# Altium PCB SPECTRE_3.0.PcbDoc
Units mm, origin at the board's own origin, x right, y up, seen from the top; angles counter-clockwise.
Board outline 28.3 x 73.29 mm, 4 copper layers (Top Layer, Signal Layer 1, Signal Layer 2, Bottom Layer), stack 0.778 mm thick; 70 components, 62 nets, 294 pads, 96 vias.
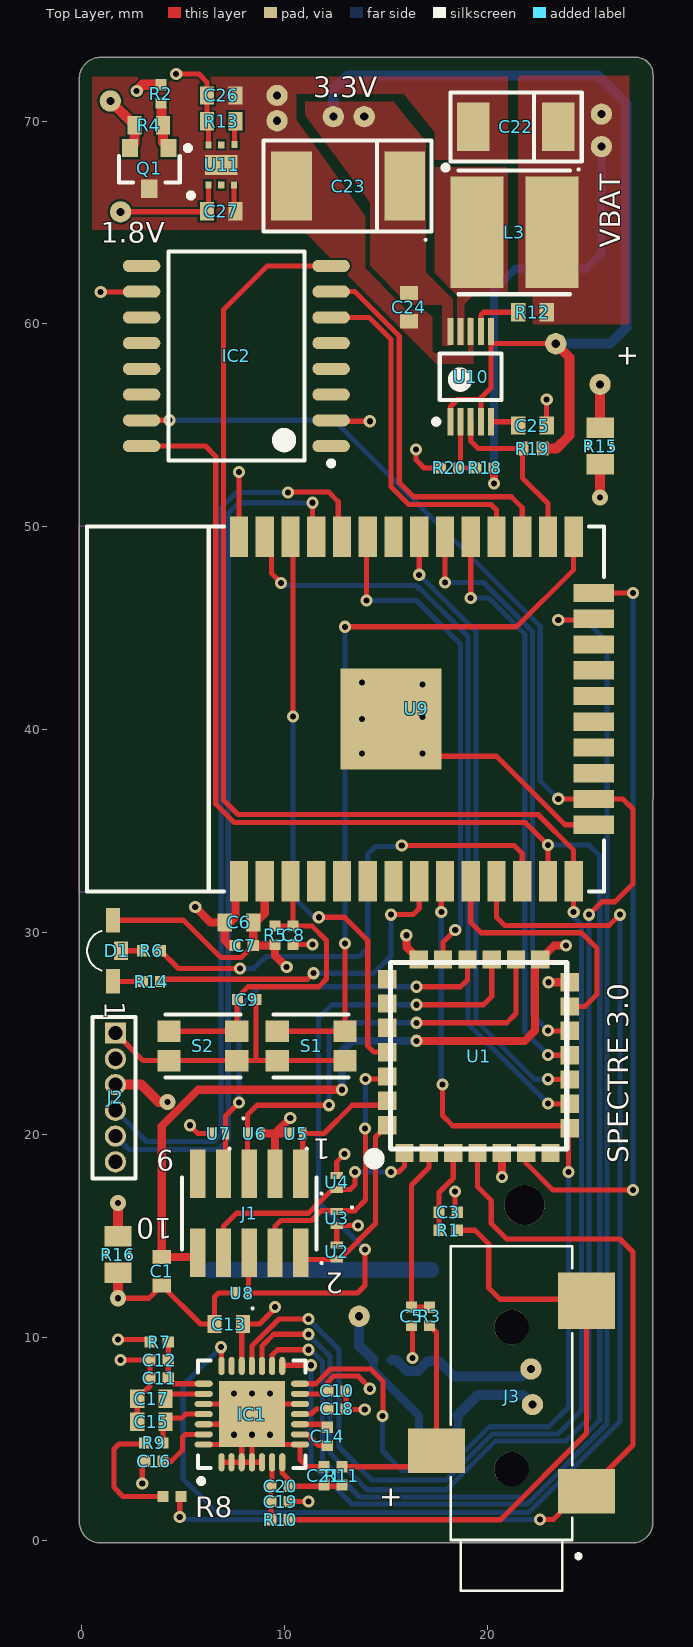
[diagram p0: Top Layer view]
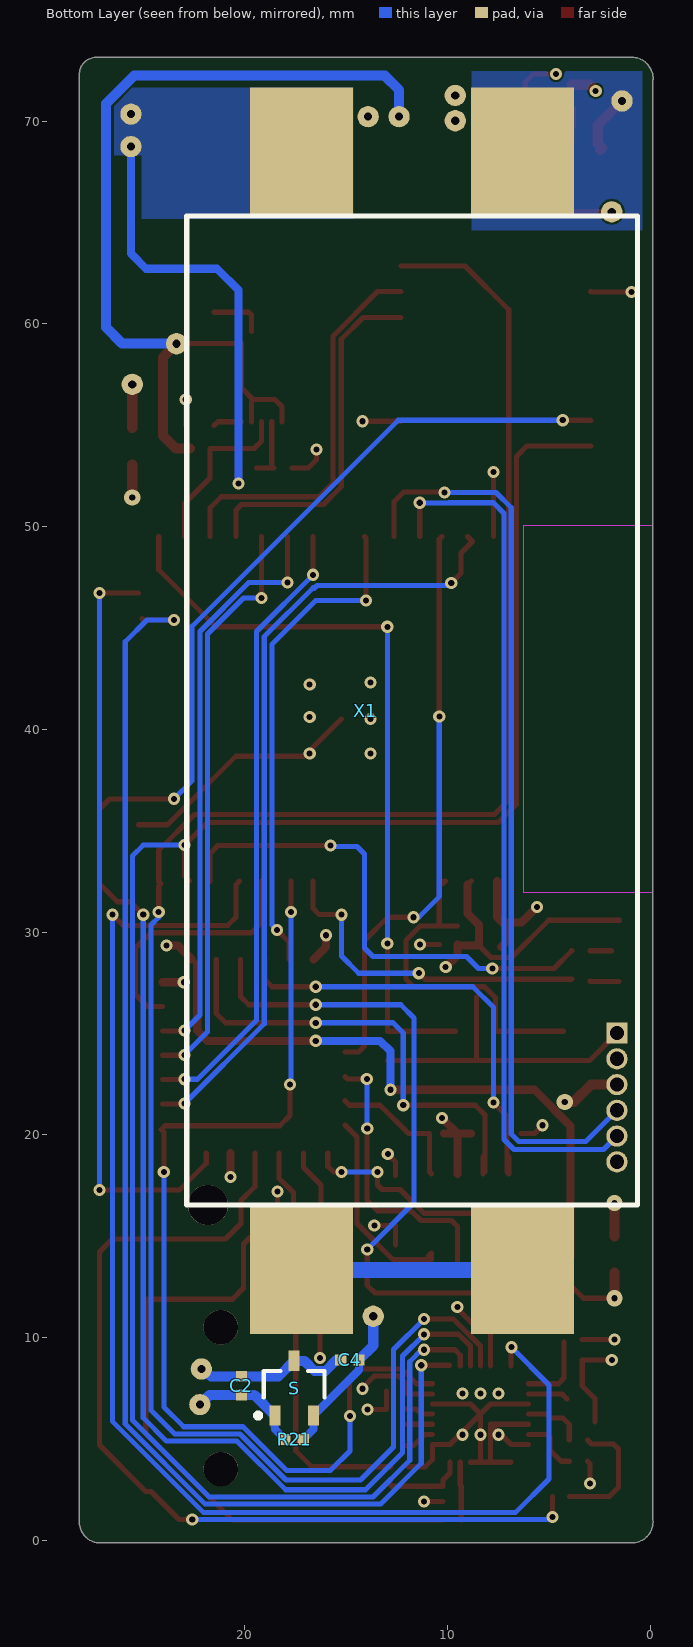
[diagram p1: Bottom Layer view, seen from below]
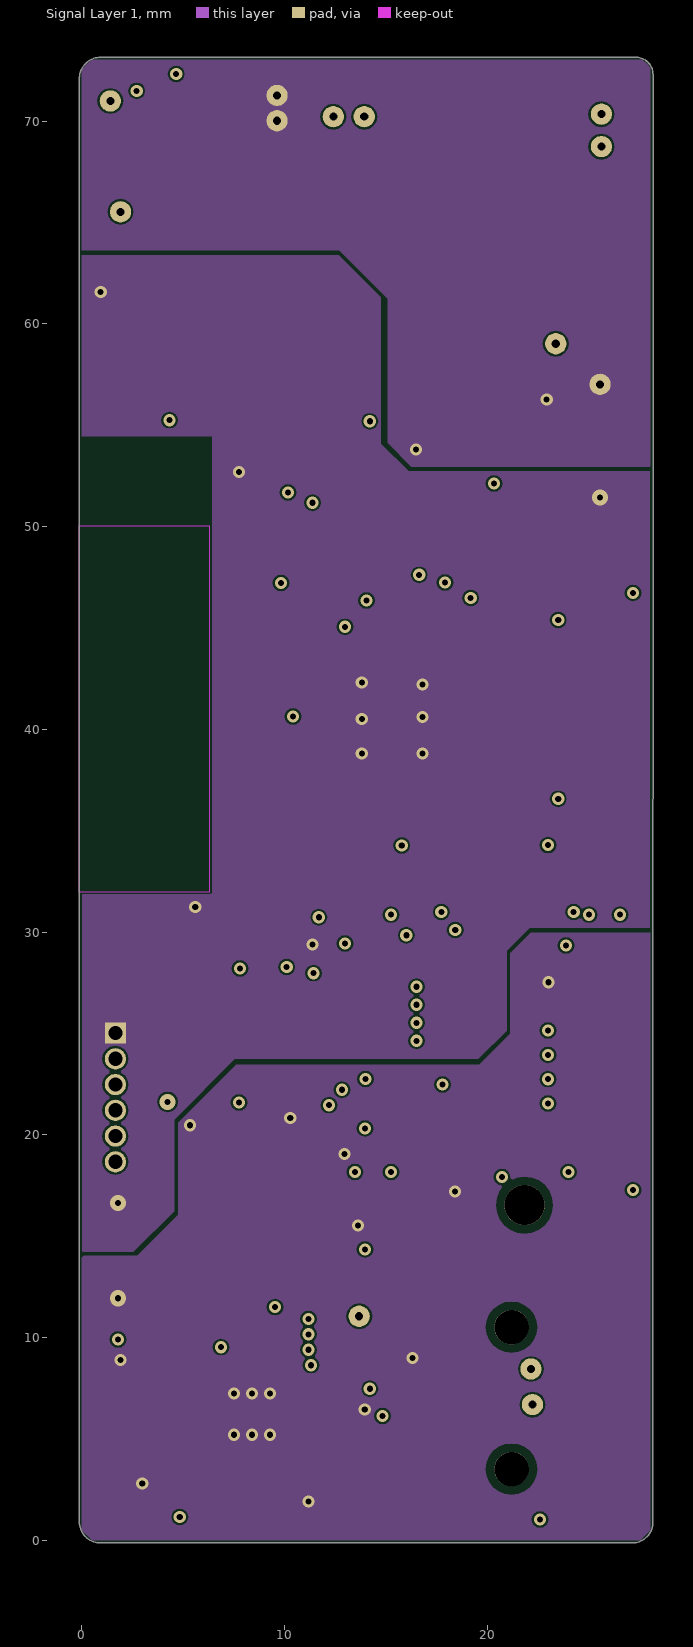
[diagram p2: Signal Layer 1]
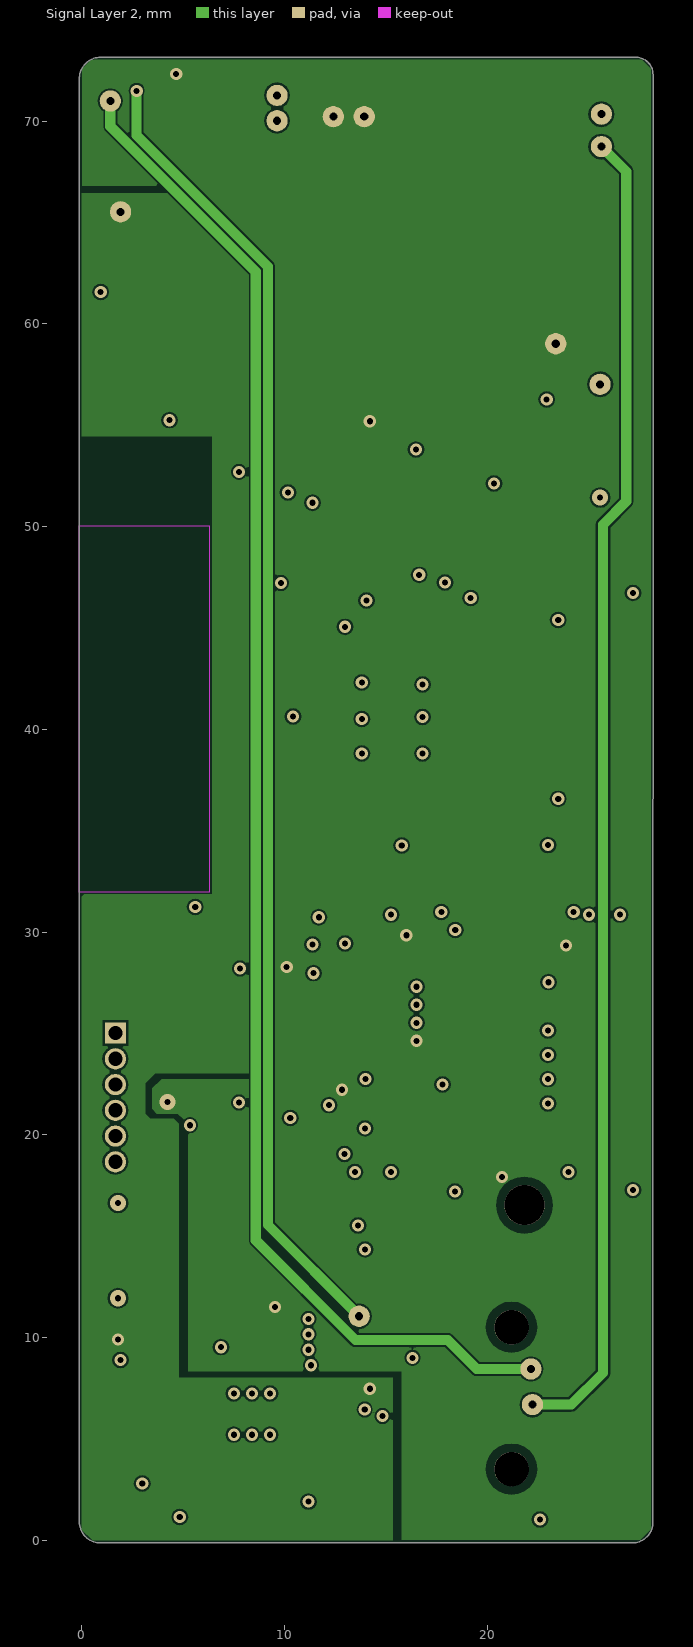
[diagram p3: Signal Layer 2]
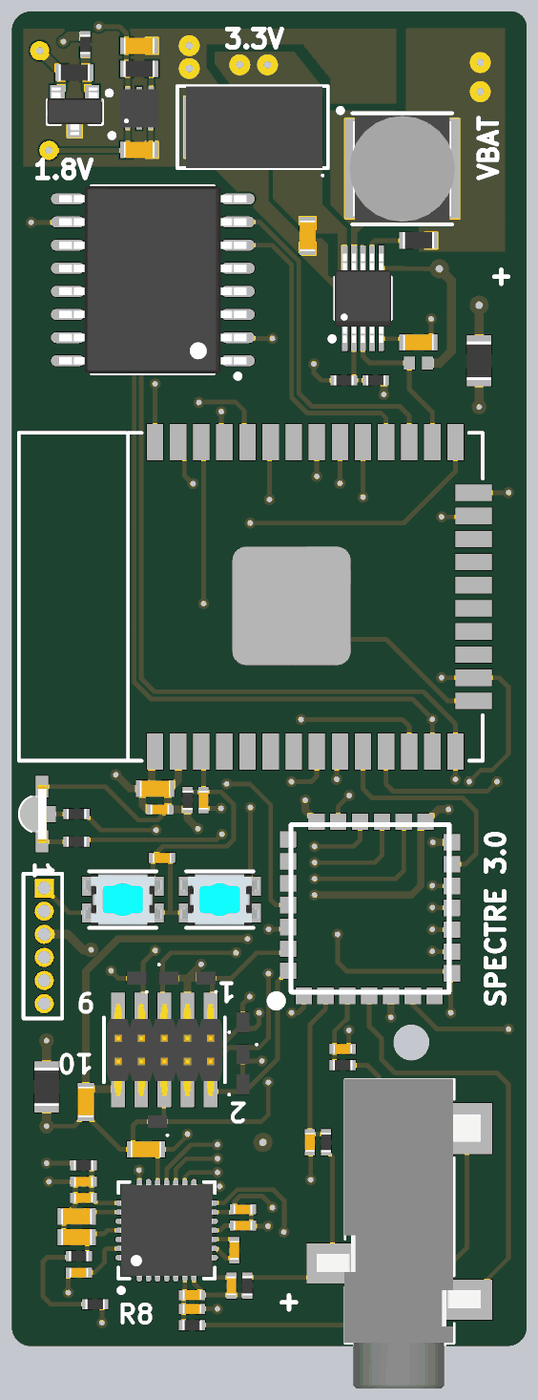
[diagram p4: 3D render of the assembled board from above, using the file's embedded part models]
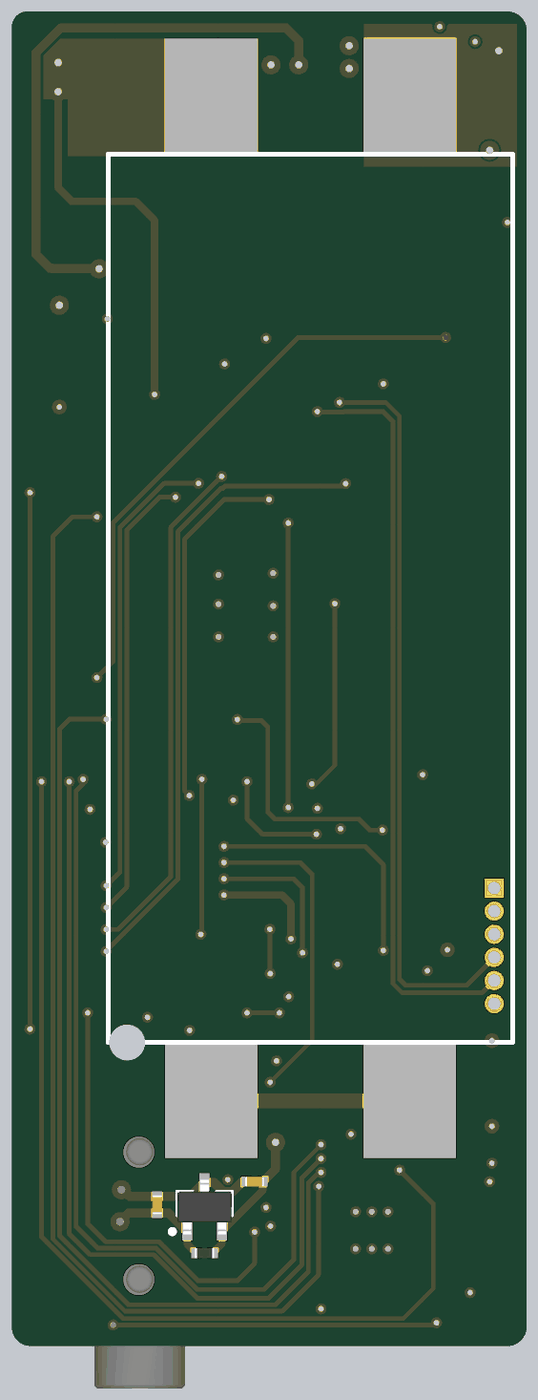
[diagram p5: 3D render of the assembled board from below, using the file's embedded part models]

## Layer stack, top to bottom
Top Solder: solder mask 0.0102, Solder Resist, Dk 3.5
Top Layer: signal copper 0.0356
Dielectric 1: core 0.254, FR-4, Dk 4.2
Signal Layer 1: signal copper 0.036
Dielectric 7: prepreg 0.127, Dk 4.2
Signal Layer 2: signal copper 0.036
Dielectric 5: core 0.254, Dk 4.2
Bottom Layer: signal copper 0.0356
Bottom Solder: solder mask 0.0102, Solder Resist, Dk 3.5

## Board outline
0.925,-0.133 cw(c0.925,0.923) -0.127,1.008 cw(c0,0.998) -0.127,1.01 cw(c0,1.025) -0.127,1.025 -0.127,72.049 cw(c-0.003,72.075) -0.13,72.071 cw(c0.925,72.1) 1.01,73.152 cw(c1,73.025) 1.014,73.152 cw(c1.027,73.025) 1.027,73.152 27.281,73.152 cw(c27.304,73.027) 27.3,73.154 cw(c27.323,72.305) 28.173,72.305 cw(c27.323,72.305) 28.17,72.241 28.169,0.897 cw(c28.042,0.897) 28.169,0.894 ccw(c27.142,0.897) 28.169,0.897 28.169,0.894 cw(c27.142,0.897) 27.064,-0.127 0.962,-0.127 cw(c0.925,-0.005)

## Design rules (kind name [scope] priority, off if disabled: settings)
Clearance Clearance_Via_Via_Same_Net [isVia vs isVia] p1: gap=0.15 ignorepadtopadclearanceinfootprint=FALSE except(0: Arc-Hole Track-Hole SMDPad-Hole THPad-Hole Via-Hole Fill-Hole Poly-Hole Region-Hole Text-Hole)
Clearance Clearance_KeepOut [All vs OnLayer('Keep-Out Layer')] p2 off: gap=1 ignorepadtopadclearanceinfootprint=FALSE except(0: Arc-Hole Track-Hole SMDPad-Hole THPad-Hole Via-Hole Fill-Hole Poly-Hole Region-Hole Text-Hole)
Clearance Clearance_NDK [NOT PadIsPlated] p3: gap=0.4 ignorepadtopadclearanceinfootprint=FALSE except(0: Arc-Hole Track-Hole SMDPad-Hole THPad-Hole Via-Hole Fill-Hole Poly-Hole Region-Hole Text-Hole)
Clearance [All] p4: gap=0.1 ignorepadtopadclearanceinfootprint=FALSE except(0: Arc-Hole Track-Hole SMDPad-Hole THPad-Hole Via-Hole Fill-Hole Poly-Hole Region-Hole Text-Hole)
ComponentClearance [All] p1: gap=0 collisioncheckmode=3 verticalgap=0.254 showdistances=FALSE
FabricationTestPointUsage TestPointUsage [All] p1: valid=0 allowmultiple=FALSE
FabricationTestpoint Testpoint [All] p1: side=3 testpointundercomponent=TRUE minsize=1.016 maxsize=2.54 preferedsize=1.524 minholesize=0 maxholesize=1.016 preferedholesize=0.813 testpointgrid=0.025 allowsidetop=TRUE allowsidebottom=TRUE usegrid=TRUE gridtolerance=0
HoleSize [All] p1: absolutevalues=TRUE maxlimit=6 minlimit=0.3 maxpercent=80.000 minpercent=20.000
MinimumAnnularRing MinimumAnnularRing_Vias [isVia] p1: minimumring=0.1
MinimumAnnularRing [All] p2: minimumring=0.1
MinimumSolderMaskSliver [All] p1: minsoldermaskwidth=0.1
NetAntennae [All] p1 off: netantennaetolerance=0
PlaneConnect PlaneConnect_Vias [isVia] p1: planeconnectstyle=Direct reliefexpansion=0.508 reliefentries=4 reliefconductorwidth=0.254 reliefairgap=0.254
PlaneConnect [All] p2: planeconnectstyle=Direct reliefexpansion=0.508 reliefentries=4 reliefconductorwidth=0.254 reliefairgap=0.254
PolygonConnect PolygonConnect_Vias [isVia] p1: connectstyle=Direct reliefconductorwidth=0.254 reliefentries=4 polygonreliefangle="90 Angle" airgapwidth=0.254
PolygonConnect [All] p2: connectstyle=Direct reliefconductorwidth=0.254 reliefentries=4 polygonreliefangle="90 Angle" airgapwidth=0.254
RoutingVias [All] p1: holewidth=0.5 width=0.8 viastyle="Through Hole" minholewidth=0.3 minwidth=0.5 maxholewidth=0.8 maxwidth=1
SMDEntry [All] p1: side=TRUE corner=TRUE anyangle=TRUE
SMDToCorner [All] p1 off: distance=196850
SilkToSilkClearance [All] p1 off: silktosilkclearance=0.15
SilkToSolderMaskClearance SilkscreenOverComponentPads [IsPad] p1 off: minsilkscreentomaskgap=0.15 clearancetoexposedcopper=FALSE
SolderMaskExpansion [All] p1: expansion=0.05 istentingtop=FALSE
ViasUnderSMD [All] p1: allowed=FALSE
Width [All] p1: maxlimit=10 minlimit=0.15 preferedwidth=0.254 checkconnectedcopper=TRUE
21 further rules are at their usual default settings.

## Classes and differential pairs
component class U_VCC: C2 C4 C22 C23 C24 C25 C26 C27 L3 Q1 R2 R4 R12 R13 R15 R16 R18 R19 R20 R21 S U10 U11 X1
component class U_SPI-Flash: IC2
component class U_MAX30003: C10 C11 C12 C13 C14 C15 C16 C17 C18 C19 C20 C21 IC1 R7 R8 R9 R10 R11
component class U_ESP32: C6 C7 C8 C9 D1 J2 R5 R6 R14 S1 S2 U9
component class U_Electrodes_SFH: C3 C5 J3 R1 R3
component class U_AFE4900: C1 J1 U1 U2 U3 U4 U5 U6 U7 U8

## Components (designator, comment, footprint, x,y, rotation, side; value= is the part's Value field where it differs from the comment)
C1 "22u" CAPC1608X05N 3.937,13.273 r90 top
C2 "10n" CAPC1005X03N 20.175,7.625 r270 bottom
C3 "10n" CAPC1005X03N 18.061,16.181 r180 top
C4 "100p" CAPC1005X03N 14.825,8.9 r0 bottom
C5 "10n" CAPC1005X03N 16.256,11.049 r90 top
C6 "10u" CAPC1608X05N 7.747,30.48 r180 top
C7 "100n" CAPC1005X03N 8.001,29.337 r180 top
C8 "100n" CAPC1005X03N 10.414,29.845 r90 top
C9 "100n" CAPC1005X03N 8.128,26.67 r0 top
C10 "1u" CAPC1005X03N 12.573,7.366 r180 top
C11 "1u" CAPC1005X03N 3.81,8.001 r0 top
C12 "100n" CAPC1005X03N 3.81,8.89 r0 top
C13 "10u" CAPC1608X05N 7.239,10.668 r180 top
C14 "1u" CAPC1005X03N 12.1,5.125 r270 top
C15 "10u" CAPC1608X05N 3.429,5.842 r0 top
C16 "1u" CAPC1005X03N 3.55,3.9 r0 top
C17 "10u" CAPC1608X05N 3.429,6.985 r0 top
C18 "1n" CAPC1005X03N 12.573,6.477 r180 top
C19 "10p" CAPC1005X03N 9.779,1.905 r180 top
C20 "1n" CAPC1005X03N 9.779,2.667 r180 top
C21 "10p" CAPC1005X03N 11.938,3.175 r90 top
C22 "47u" "AVX TPSC476M016R0350" -46.796,32.323 r180 top
C23 "47u" "AVX TPSD107M010R0100 100uF" 13.208,66.802 r180 top
C24 "1u" CAPC1608X05N 16.129,60.833 r90 top
C25 "100n" CAPC1608X05N 22.225,54.991 r0 top
C26 "1u" CAPC1608X05N 6.873,71.272 r180 top
C27 "1u" CAPC1608X05N 6.873,65.557 r180 top
D1 "Red & Bright Green, 120deg" WL-SBSW_1204 1.016,29.083 r90 top
IC1 "MAX30003" MAX30003CTI+T2855-8 8.382,6.223 r90 top
IC2 "SPI Flash Memory Chip 1Gbit S70FL01GS" S70FL01GS 7.62,58.42 r180 top
J1 "1.27 mm_SMD_Vertical_10 pin" 62131021021 8.255,16.129 r180 top
J2 "SLM-106-01-G-S" SLM-106-01-G-S 2.286,22.479 r270 top
J3 "SJ-3523-SMT-TR" *CUI_SJ-3523-SMT-TR 21.192,3.513 r90 top
L3 "22uH" CD54-220 21.336,64.516 r0 top
Q1 "NTR4170NT1G MOSFET" NTR4170NT1G 3.325,67.675 r270 top
R1 "499k" RESC1005X03N 18.061,15.292 r180 top
R2 "100R" RESC1005X03N 3.9,71.35 r270 top
R3 "499k" RESC1005X03N 17.145,11.049 r90 top
R4 "10M" RESC1608X05N 3.3,69.8 r180 top
R5 "10k" RESC1005X03N 9.525,29.845 r270 top
R6 "340" RESC1005X03N 3.429,29.083 r180 top
R7 "0R" RESC1005X03N 3.81,9.779 r0 top
R8 "0R" RESC1005X03N 4.445,2.159 r180 top
R9 "499k" RESC1005X03N 3.55,4.8 r0 top
R10 "50k" RESC1005X03N 9.779,1.016 r180 top
R11 "50k" RESC1005X03N 12.827,3.175 r270 top
R12 "200R" RESC1608X05N 22.225,60.579 r180 top
R13 "0R" RESC1608X05N 6.873,70.002 r0 top
R14 "1k" RESC1005X03N 3.429,27.559 r180 top
R15 "0R" RESC2012X05N 25.56,53.975 r270 top
R16 "0R" RESC2012X05N 1.778,14.097 r270 top
R18 "0R" RESC1005X03N 19.875,52.9 r0 top
R19 "R 0402" "R 0402" 22.225,53.85 r0 top
R20 "0R" RESC1005X03N 18.125,52.9 r0 top
R21 "100k" RESC1005X03N 17.575,4.975 r0 bottom
S "MLX90248 Hall Switch" MLX90248 17.575,7.5 r90 bottom
S1 "434153017835" 434153017835 11.303,24.384 r0 top
S2 "434153017835" 434153017835 5.969,24.384 r0 top
U1 "AFE4900_special" AFE4900_Breakout 19.558,23.622 r180 top
U2 "TPD1E10B06DPYR" TPD1E10B06DPYR_0402 12.573,14.224 r90 top
U3 "TPD1E10B06DPYR" TPD1E10B06DPYR_0402 12.573,15.875 r270 top
U4 "TPD1E10B06DPYR" TPD1E10B06DPYR_0402 12.573,17.653 r90 top
U5 "TPD1E10B06DPYR" TPD1E10B06DPYR_0402 10.541,20.066 r180 top
U6 "TPD1E10B06DPYR" TPD1E10B06DPYR_0402 8.509,20.066 r0 top
U7 "TPD1E10B06DPYR" TPD1E10B06DPYR_0402 6.731,20.066 r180 top
U8 "TPD1E10B06DPYR" TPD1E10B06DPYR_0402 7.874,12.192 r180 top
U9 "ESP32" ESP32-WROOM-32 13.007,41.012 r90 top
U10 "MAX1676" MAX1676-Boost 19.177,57.404 r90 top
U11 "LDO 1.8V" TLV75518PDRVR 6.873,67.843 r90 top
X1 "SMT Battery Holder 2 Cells" "SMT Battery Holder" 11.755,40.93 r90 bottom

## Footprints (in the part's own frame and the unit in brackets; to place one, negate y for a bottom-side part, rotate by r counter-clockwise, add the part's x,y. Pads: shape width x height; smd on the part's side, far side on the other; paste and mask are expansions set on the pad)
62131021021 [mm] "Pin Header, pitch 1.27 mm, SMD, Vertical, dual row, 10p"
  rect 0.75x2.4 smd: 1(-2.54,-1.95) 2(-2.54,1.95) 3(-1.27,-1.95) 4(-1.27,1.95) 5(0,-1.95) 6(0,1.95) 7(1.27,-1.95) 8(1.27,1.95) 9(2.54,-1.95) 10(2.54,1.95)
  silkscreen extent -3.32,-1.78 3.32,1.78, body extent -3.18,-2.55 3.17,2.55, height 5.9
434153017835 [mm] "Tact Switch, SMD, body 3.5x2.9mm"
  rect 1.15x1.05 smd: 1(-1.675,0.725) 2(-1.675,-0.725) 3(1.675,0.725) 4(1.675,-0.725)
  silkscreen extent -1.85,-1.55 1.85,1.55, body extent -2.15,-1.45 2.15,1.45, height 1.7
*CUI_SJ-3523-SMT-TR [mm]
  rect 2.2x2.8 smd: 1(-1.1,-3.7) 3(0.9,3.7)
  rect 2.8x2.8 smd: 2(8.3,-3.7)
  round 1.7 hole 1.7 unplated: None(0,0) None(7,0)
  silkscreen extent -6,-3.4 11,3, body extent -5.98,-4.45 11.02,4.55, height 5
AFE4900_Breakout [mm]
  rect 0.9x0.9 smd: A1(2.444,4.518) A2(4.494,3.143) A3(4.494,0.743) A4(4.494,-0.457) A5(4.494,-1.657) B1(1.244,4.518) B2(3.644,4.518) B3(4.494,1.943) B5(4.494,-2.857) C1(-1.156,4.518) C2(0.044,4.518) C4(2.944,-5.032) C5(4.494,-4.057) D2(-3.556,4.518) D3(1.744,-5.032) D4(-0.656,-5.032) D5(-4.506,-3.907) E1(-2.356,4.518) E2(-4.506,0.893) E3(-4.506,-0.307) E4(-1.856,-5.032) E5(0.544,-5.032) F1(-4.506,3.293) F2(-4.506,2.093) F3(-4.506,-1.507) F4(-4.506,-2.707) F5(-3.056,-5.032)
  silkscreen extent -4.36,-4.88 5.28,4.93
"AVX TPSC476M016R0350" [mm] "47uF, 16V tantalum capacitor, DFN, 2-Leads, Body 3,25x6,00mm, Pitch 4,20mm, IPC Medium Density"
  rect 1.6x2.4 smd: 1(-70.3,-37.4) 2(-66.1,-37.4)
  silkscreen extent -71.45,-39.1 -64.97,-35.25, body extent -71.3,-39.1 -65.1,-35.7, height 2.8
"AVX TPSD107M010R0100 100uF" [mm] "100uF, 10V tantalum capacitor, DFN, 2-Leads, Body 4,35x7,30mm, Pitch 5,70mm, IPC Medium Density"
  rect 2x3.4 smd: 1(-2.718,0) 2(2.87,0)
  silkscreen extent -4.04,-2.25 4.24,2.7, body extent -3.75,-2.25 3.75,2.25, height 3.1
CAPC1005X03N [mm] "Chip Capacitor, 2-Leads, Body 1,00x0,50mm, IPC Medium Density, 0402"
  rect 0.55x0.55 smd: 1(-0.45,0) 2(0.45,0)
  body extent -0.52,-0.28 0.52,0.28, height 0.35
CAPC1608X05N [mm] "Chip Capacitor, 2-Leads, Body 1,60x0,80mm, IPC Medium Density, 0603"
  rect 0.7x0.9 smd: 1(-0.7,0) 2(0.7,0)
  body extent -0.85,-0.45 0.85,0.45, height 0.45
CD54-220 [mm] "22uF, 1.11A Inductor, Precision Wire Wound Inductor, 2-Leads, Body 5,20x5,80mm, IPC Medium Density"
  rect 2.6x5.5 smd: 1(-1.85,0) 2(1.85,0)
  silkscreen extent -3.52,-3.05 2.75,3.32, body extent -2.9,-2.9 2.9,2.9, height 4.95
ESP32-WROOM-32 [mm] "ESP32-WROOM-32-Module"
  rect 2x0.9 smd: 1(-8.5,5.26) 2(-8.5,3.99) 3(-8.5,2.72) 4(-8.5,1.45) 5(-8.5,0.18) 6(-8.5,-1.09) 7(-8.5,-2.36) 8(-8.5,-3.63) 9(-8.5,-4.9) 10(-8.5,-6.17) 11(-8.5,-7.44) 12(-8.5,-8.71) 13(-8.5,-9.98) 14(-8.5,-11.25) 25(8.5,-11.25) 26(8.5,-9.98) 27(8.5,-8.71) 28(8.5,-7.44) 29(8.5,-6.17) 30(8.5,-4.9) 31(8.5,-3.63) 32(8.5,-2.36) 33(8.5,-1.09) 34(8.5,0.18) 35(8.5,1.45) 36(8.5,2.72) 37(8.5,3.99) 38(8.5,5.26)
  rect 0.9x2 smd: 15(-5.715,-12.25) 16(-4.445,-12.25) 17(-3.175,-12.25) 18(-1.905,-12.25) 19(-0.635,-12.25) 20(0.635,-12.25) 21(1.905,-12.25) 22(3.175,-12.25) 23(4.445,-12.25) 24(5.715,-12.25)
  rect 5x5 smd paste+0.75: 101(-0.5,-2.24)
  silkscreen extent -9,-12.75 9,12.75, body extent -9,-12.75 9,12.75, height 2.3
MAX1676-Boost [mm] "Boost, Step-Up DC-DC Converter, TSSOP, 10-Leads, Body 2,82x1049,03mm, Pitch 0,50mm, IPC Medium Density"
  rect 1.35x0.3 smd: 1(-2.225,1) 2(-2.225,0.5) 3(-2.225,0) 4(-2.225,-0.5) 5(-2.225,-1) 6(2.225,-1) 7(2.225,-0.5) 8(2.225,0) 9(2.225,0.5) 10(2.225,1)
  silkscreen extent -2.35,-1.52 1.15,1.82, body extent -2.45,-1.55 2.45,1.55, height 1.1
MAX30003CTI+T2855-8 [mm] "QFN, 28-Leads, Body 5.00x5.00mm, Pitch 0.50mm, Thermal Pad 3.25x3.25mm, IPC Medium Density"
  oval 0.9x0.3 smd: 1(-2.375,1.5) 2(-2.375,1) 3(-2.375,0.5) 4(-2.375,0) 5(-2.375,-0.5) 6(-2.375,-1) 7(-2.375,-1.5) 15(2.375,-1.5) 16(2.375,-1) 17(2.375,-0.5) 18(2.375,0) 19(2.375,0.5) 20(2.375,1) 21(2.375,1.5)
  oval 0.3x0.9 smd: 8(-1.5,-2.375) 9(-1,-2.375) 10(-0.5,-2.375) 11(0,-2.375) 12(0.5,-2.375) 13(1,-2.375) 14(1.5,-2.375) 22(1.5,2.375) 23(1,2.375) 24(0.5,2.375) 25(0,2.375) 26(-0.5,2.375) 27(-1,2.375) 28(-1.5,2.375)
  rect 3.25x3.25 smd: 29(0,0)
  silkscreen extent -3.42,-2.65 2.65,2.65, body extent -2.52,-2.52 2.52,2.52, height 0.8
MLX90248 [mm] "Hall Switch 3V TSOT-3L Melexis"
  rect 1x0.55 smd: 1(-1.35,0.95) 2(-1.35,-0.95) 3(1.35,0)
  silkscreen extent -1.47,-1.5 0.85,1.9, body extent -1.5,-1.5 1.5,1.5, height 1
NTR4170NT1G [mm] "MOSFET 30V 3.9A - SOT23, 3-Leads, Body 2,92x2,45mm, Pitch 0,95mm, IPC Medium Density"
  rect 0.9x0.8 smd: 1(-1,0.95) 2(-1,-0.95) 3(1,0)
  silkscreen extent -1.12,-1.5 0.7,2.03, body extent -1.3,-1.52 1.3,1.52, height 1.11
"R 0402" [mm]
  rect 0.6x0.7 smd: 1(-0.5,0) 2(0.5,0)
  body extent -0.57,-0.28 0.57,0.28, height 0.48
RESC1005X03N [mm] "Chip Resistor, 2-Leads, Body 1,00x0,50mm, IPC Medium Density, 0402"
  rect 0.55x0.55 smd: 1(-0.45,0) 2(0.45,0)
  body extent -0.53,-0.28 0.53,0.28, height 0.35
RESC1608X05N [mm] "Chip Resistor, 2-Leads, Body 1,60x0,80mm, IPC Medium Density, 0603"
  rect 0.7x0.9 smd: 1(-0.7,0) 2(0.7,0)
  body extent -0.85,-0.45 0.85,0.45, height 0.45
RESC2012X05N [mm] "Chip Resistor, 2-Leads, Body 2,00x1,25mm, IPC Medium Density, 0805"
  rect 1x1.35 smd: 1(-0.9,0) 2(0.9,0)
  silkscreen extent -0.1,-0.58 0.1,0.58, body extent -1.05,-0.67 1.05,0.67, height 0.5
S70FL01GS [mm] "SOIC, 16-Leads, Body 10,30x7,50mm, Pitch 1,27mm, IPC Medium Density"
  oval 1.85x0.6 smd: 1(-4.675,4.445) 2(-4.675,3.175) 3(-4.675,1.905) 4(-4.675,0.635) 5(-4.675,-0.635) 6(-4.675,-1.905) 7(-4.675,-3.175) 8(-4.675,-4.445) 9(4.675,-4.445) 10(4.675,-3.175) 11(4.675,-1.905) 12(4.675,-0.635) 13(4.675,0.635) 14(4.675,1.905) 15(4.675,3.175) 16(4.675,4.445)
  silkscreen extent -4.8,-5.15 3.35,5.42, body extent -5.15,-5.15 5.15,5.15, height 2.65
SLM-106-01-G-S [mm] "Pin Header, pitch 1.27 mm, THT, Vertical, single row, 6p"
  rect 1.05x1.05 hole 0.7: 1(-2.54,-0.635)
  round 1.05 hole 0.7: 2(-1.27,-0.635) 3(0,-0.635) 4(1.27,-0.635) 5(2.54,-0.635) 6(3.81,-0.635)
  silkscreen extent -3.32,-1.78 4.62,0.36
"SMT Battery Holder" [mm] "SMT Battery Holder, Zylindrisch, 2 Cells AAA"
  round 1.98 hole 1.98 unplated mask+0.05: 0(-24.395,10.075)
  rect 6.35x5.08 smd: 1(-27.57,5.455) 2(-27.57,-5.455) 3(27.57,-5.455) 4(27.57,5.455)
  silkscreen extent -24.4,-11.11 24.4,11.11
TLV75518PDRVR [mm] "LDO1.8V, QFN, 6-Leads, Body 2.00x2.00mm, Pitch 0.00mm/0.65mm, Thermal Pad 1.00x1.60mm, IPC Medium Density"
  rect 0.35x0.3 smd: 1(-0.991,0.635) 2(-0.991,0) 3(-0.991,-0.635) 4(1.016,-0.66) 5(0.991,0) 6(0.991,0.635)
  rect 1x1.6 smd: 7(0,0)
  silkscreen extent -1.62,1.37 -1.38,1.62, body extent -1.05,-1.05 1.05,1.05, height 0.8
TPD1E10B06DPYR_0402 [mm] "ESD-Entstörer/TVS-Dioden, DFN, 2-Leads, 0402, Body 0.60x1.00mm, Pitch 0.70mm, IPC Medium Density"
  rect 0.35x0.6 smd: 1(-0.35,0) 2(0.35,0)
  silkscreen extent -0.6,0.7 -0.5,0.8, body extent -0.55,-0.35 0.55,0.35, height 0.45
WL-SBSW_1204 [mm] "SMD Bi-color Side view Waterclear, body 3.2x1mm"
  rect 0.9x0.7 smd: 1(0,-0.91)
  rect 1.2x0.7 smd: 2(1.5,-0.51) 3(-1.5,-0.51)
  silkscreen extent -0.98,0.04 0.98,0.75, body extent -1.6,-0.76 1.6,0.74, height 1.02

## Part data
C1: library part C_22u_0603, "Kondensator 22u 0603", Tested=False
C2 C3 C5: library part C_10n_50V_0402, "Kondensator 10n 50V 0402", Supplier Part Number 1=1828887, Supplier 1=Farnell, Tested=False
C4: library part C_100p_50V_0402, "Kondensator 100p 50V 0402", Supplier 1=Farnell, Tested=False
C6 C13 C15 C17: library part C_10u_10V_0603, "Kondensator 10u 10V 0603", Supplier Part Number 1=2521952, Supplier 1=Farnell
C7 C8 C9 C12: library part C_100n_50V_0402, "Kondensator 100n 50V 0402", Supplier Part Number 1=2210822, Supplier 1=Farnell, Tested=False
C10 C11 C14 C16: library part C_1u_6V3_0402, "Kondensator 1u 6V3 0402", Supplier Part Number 1=2672114, Supplier 1=Farnell, Tested=False
C18 C20: library part C_1n_50V_0402, "Kondensator 1n 50V 0402", Supplier Part Number 1=399-10034-1-ND, Supplier 1=Digikey, Tested=False
C19 C21: library part C_10p_25V_NP0_0402, "Kondensator 10p 25V NP0 0402", Supplier Part Number 1=710-885012005040, Supplier 1=Mouser, Tested=False
C22: library part C_47u_16V_2312, "Kondensator 47u 16V Tanatalum Capacitor", Cart=https://www.mouser.de/ProductDetail/AVX/TPSC476M016R0350?qs=%2Fha2pyFaduhj%252BASDCSGgk2azjUMSnKvo3TkO6PkyHka4p8K%2FssSCRw%3D%3D, Datasheet=https://www.mouser.de/datasheet/2/40/tps-776850.pdf
C23: library part C_100u_10V_2917, "Kondensator 100u 10V Tanatalum Capacitor", Cart=https://www.mouser.de/ProductDetail/AVX/TPSC476M016R0350?qs=%2Fha2pyFaduhj%252BASDCSGgk2azjUMSnKvo3TkO6PkyHka4p8K%2FssSCRw%3D%3D, Datasheet=https://www.mouser.de/datasheet/2/40/tps-776850.pdf
C24 C26 C27: library part C_1u_25V_0603, "Kondensator 1u 25V X7R 0603", Supplier Part Number 1=2495176, Supplier 1=Farnell, Tested=False
C25: library part C_100n_50V_0603, "Kondensator 100n 50V 0603", Supplier Part Number 1=1759122, Supplier 1=Farnell
D1: library part 155124RV73200, "WL-SBSW SMT Bi-color Side View Waterclear, size 1204, Red & Bright Green, 120deg", Emitting Color="Red & Bright Green", Forward Voltage="2V@Red, 2.1V@Bright Green", Operating Temperature="-40 to +85degC", Chip Technology=AlInGaP, ComponentLink1Description=Manufacturer, ComponentLink1URL=http://www.we-online.de, ComponentLink2Description=Datasheet, ComponentLink2URL=https://katalog.we-online.de/led/datasheet/155124RV73200.pdf, Dominant Wavelength="624nm@Red, 571nm@Bright Green", Luminous Intensity="60mcd@Red, 30mcd@Bright Green", Mounting Technology=SMT, Packaging="Tape and Reel", Part Number=155124RV73200, Peak Wavelength="632nm@Red, 573nm@Bright Green", Published Date="October 2019", Publisher="Wurth Elektronik", Size=1204, Viewing Angle=120deg
IC1: library part MAX30003CTI+
J1: library part 62131021021, "Pin Header WR-PHD, pitch 1.27 mm, SMD, Vertical, dual row, 10 pin", Contact Resistance="20 mOhm", Insulation Resistance=">1000 MOhm", Operating Temperature="-40 to 105 degC", Rated Current="1 A", Working Voltage="100 VAC", ComponentLink1Description=Manufacturer, ComponentLink1URL=http://www.we-online.de, ComponentLink2Description=Datasheet, ComponentLink2URL=http://katalog.we-online.de/em/datasheet/62131021021.pdf, Mounting Technology=SMD, Orientation=Vertical, Part Number=62131021021, Pin Number=10, Pitch="1.27 mm", Published Date="Jan. 2018", Publisher="Wurth Elektronik", Row Number=Dual
L3: library part L_22uH_CD54-220, "22uH power inductor (1.1 A) Sumida CD54-220", Cart=https://www.digikey.de/product-detail/de/sumida-america-components-inc/CD54NP-220MC/308-2271-1-ND/4356341, Datasheet=http://products.sumida.com/products/pdf/CD54.pdf
Q1: "NTR4170NT1G MOSFET 30V 3.9A"
R1 R3 R9: library part R_0402, "Widerstand 0402", Tested=False
R2: library part R_100R_0402, "Widerstand 100R 1% 0402", Supplier Part Number 1=9239111, Supplier 1=Farnell, Tested=False
R4: library part R_10M_0603, "Widerstand 10M 1% 100mW 75V 0603", Supplier Part Number 1=660-RK73H1JTTD1005F, Supplier 1=Mouser, Tested=False
R5: library part R_10k_0402, "Widerstand 10k 1% 0402", Supplier Part Number 1=1358069, Supplier 1=Farnell, Tested=False
R6: library part R_0R_0402, "Widerstand 340R 0402", Supplier Part Number 1=2059190, Supplier 1=Farnell, Tested=True
R7 R8 R18 R20: library part R_0R_0402, "Widerstand 0R 0402", Supplier Part Number 1=2059190, Supplier 1=Farnell, Tested=True
R10 R11: library part R_0R_0402, "Widerstand 50k 0402", Supplier Part Number 1=2059190, Supplier 1=Farnell, Tested=True
R12: library part R_200R_0603, "Widerstand 200R 1% 100mW 50V 0603", Supplier Part Number 1=2447292, Supplier 1=Farnell, Tested=False
R13: library part R_0R_0603, "Widerstand 0R 0603", Supplier Part Number 1=2059527, Supplier 1=Farnell, Tested=False
R14: library part R_1k_0402, "Widerstand 1k 1% 0402", Supplier Part Number 1=2447120, Supplier 1=Farnell, Tested=False
R15 R16: library part R_0R_0805, "Widerstand 0R 0805", Supplier Part Number 1=2057661, Supplier 1=Farnell, Tested=False
R21: library part R_10k_0402, "Widerstand 100k 1% 0402", Supplier Part Number 1=1358069, Supplier 1=Farnell, Tested=False
S1 S2: "3.5x2.9mm SMD J-Bend WS-TASV, height 1.7 mm, 350 gf", Operating Temperature="-40 to +85 degC", Rated Current="50 mA", Rated Voltage="12 VDC", ComponentLink1Description=Manufacturer, ComponentLink1URL=http://www.we-online.de, ComponentLink2Description=Datasheet, ComponentLink2URL=http://katalog.we-online.de/em/datasheet/434153017835.pdf, Life Cycle=200000, Operation Force="350 gf", Part Number=434153017835, Published Date="Nov. 2017", Publisher="Wurth Elektronik", Size="3.5x2.9x1.7 mm"
U1: "Synchronized_ECG_and_PPG_AFE"
U2 U3 U4 U5 U6 U7 U8: "TPD1E10B06DPYR 0402"
U9: library part ESP32-WROOM32, "Espressiv ESP32-WROOM32 WLAN Bluetooth Module", HelpURL=https://www.espressif.com/en/products/hardware/esp-wroom-32/overview
U10: "Boost, Step-Up DC-DC Converter"
U11: library part LDO_1.8V_TLV75518PDRVR
X1: "SMT Battery Holder, Keystone Electronics, 2 Cells AAA", Cart=https://www.digikey.de/product-detail/de/keystone-electronics/1022/36-1022-ND/2137859, Datasheet=https://www.keyelco.com/userAssets/file/M65p23.pdf

## Free pads (board coordinates)
  round 1.05 hole 0.4 mask+0.05: ""(1.4,71) ""(1.905,65.532) ""(9.625,70.025) ""(9.625,71.275) ""(12.4,70.225) ""(13.675,11.05) ""(13.925,70.225) ""(22.15,8.45) ""(22.225,6.694) ""(23.375,59.025) ""(25.56,57.023) ""(25.625,68.75) ""(25.625,70.35)

## Via types
v1: diameter 0.6, hole 0.3, Top Layer to Bottom Layer, tented both sides, 85 vias
v2: diameter 0.6, hole 0.3, Top Layer to Bottom Layer, tented bottom, 7 vias
v3: diameter 0.8, hole 0.3, Top Layer to Bottom Layer, tented both sides, 4 vias

## Nets (pads, with @x,y where several pads share a name; then routed paths per layer and width w, separated by ;. In a path a pad name is that pad's centre, name@x,y a point inside that pad or via, vN(x,y) a via of type N, cw(c..) or ccw(c..) an arc to the next point about the centre after c; other vN are vias at no path point)
"AFE ADC RDY": U1.F4 U9.10 | length 12.6
  Top Layer w0.254: U9.10 19.177,30.48 19.685,29.972 24.638,29.972 25.4,29.21 25.4,26.924 24.805,26.329 U1.F4
"AFE CLK": IC1.14 U1.F1 U9.9 | length 51
  Top Layer w0.254: IC1.14 11.533,7.723 12.264,8.454 14.246,8.454 14.85,7.85 14.85,6.15 v1(14.825,6.125) ; v1(17.727,30.988) U9.9@17.727,32.521 ; v1(17.78,22.479) 17.78,20.955 18.288,20.447 23.946,20.447 U1.F1 24.13,20.263 24.003,20.136 v1(24.003,18.161)
  Bottom Layer w0.254: v1(14.825,6.125) 14.825,4.4 15.775,3.45 17.949,3.45 20.097,5.598 23.023,5.598 24.003,6.578 v1(24.003,18.161) ; v1(17.727,30.988) 17.727,22.553 17.78,22.606 v1(17.78,22.479)
"AFE I2C CLK": U1.F3 U9.30 | length 28.7
  Top Layer w0.254: v1(17.907,47.244) U9.30 ; v1(22.987,25.146) 23.004,25.129 U1.F3
  Bottom Layer w0.254: v1(17.907,47.244) 19.812,47.244 22.225,44.831 22.225,25.908 v1(22.987,25.146)
"AFE I2C DAT": U1.F2 U9.37 | length 38.9
  Top Layer w0.254: U9.37 8.775,49.27 9.35,48.695 9.35,47.7 v1(9.825,47.225) ; v1(22.987,21.546) 23.241,21.546 23.258,21.529 U1.F2
  Bottom Layer w0.254: v1(9.825,47.225) 9.952,47.098 16.449,47.098 16.597,46.95 16.637,46.99 19.05,44.577 19.05,25.483 v1(22.987,21.546)
"AFE I2C SPI SEL": U1.A4 U9.36 | length 28.7
  Top Layer w0.254: U9.36 10.414,49.385 v1(10.414,40.64) ; v1(11.684,30.734) 12.954,30.734 14.097,29.591 14.097,24.384 14.402,24.079 U1.A4
  Bottom Layer w0.254: v1(10.414,40.64) 10.414,31.75 11.43,30.734 v1(11.684,30.734)
"AFE PROGOUT1": U1.D3 U9.33 | length 24.6
  Top Layer w0.254: v1(14.034,46.355) 14.034,49.449 U9.33 ; U1.D3 17.814,29.498 v1(18.415,30.099)
  Bottom Layer w0.254: v1(14.034,46.355) 16.51,46.355 18.669,44.196 18.669,30.353 v1(18.415,30.099)
"AFE RESETZ": U1.E1 U9.24 | length 37.7
  Top Layer w0.254: U1.E1 21.914,18.599 23.241,17.272 v1(27.178,17.272) ; U9.24 27.169,46.727 v1(27.178,46.736)
  Bottom Layer w0.254: v1(27.178,17.272) v1(27.178,46.736)
AGND: C1.1 C3.1 C5.1 C10.1 C11.1 C12.1 C13.2 C15.1 C16.1 C17.1 C18.1 C19.1 C21.2 IC1.1 IC1.2 IC1.3 IC1.4 IC1.5 IC1.8 IC1.12 IC1.24 IC1.26 IC1.28 IC1.29 J1.3 R16.2 U1.D5 U2.2 U3.2 U4.2 U5.2 U6.2 U7.2 U8.2 | length 51.4
  Top Layer w0.254: v3(1.778,11.938) 3.302,11.938 C1.1 5.842,10.668 C13.2 6.539,12 6.731,12.192 U8.2 ; v1(1.905,8.89) C12.1 C11.1 3.36,7.616 C17.1 C15.1 ; v1(2.975,2.8) 2.975,3.775 C16.1 ; v1(5.325,20.475) 5.325,20.456 5.715,20.066 U7.2 ; IC1.28 6.882,4.723 IC1.29@7.882,5.723 ; IC1.26 IC1.29@7.882,5.723 ; IC1.24 7.882,6.723 IC1.29 ; IC1.1 IC1.2 IC1.3 ; IC1.5 IC1.4 ; C19.1 v1(11.176,1.905) ; IC1.12 8.882,6.723 IC1.29 ; C21.2 11.107,3.625 10.757,3.975 IC1.8 9.882,4.723 IC1.29 ; U2.2 U3.2 v1(13.62,15.525) ; U4.2 12.573,18.669 v1(12.954,19.05) ; C10.1 C18.1 13.05,6.45 v1(13.95,6.45) ; C5.1 16.3,10.555 v1(16.3,9) ; v1(18.4,17.2) 18.4,16.32 18.525,16.195 C3.1 ; IC1.3 IC1.29@7.882,5.723 ; IC1.3 IC1.4 ; IC1.4 v1(8.382,5.207) IC1.29
  Top Layer w0.4: U6.2 9.525,20.066 ; J1.3 9.525,20.066 ; U5.2 9.525,20.066 ; v1(10.276,20.826) 10.276,20.817 9.525,20.066 ; v1(23.017,27.529) U1.D5
  Top Layer w0.5: v3(1.778,11.938) R16.2
  other v1: 7.493,5.207 9.271,5.207 7.493,7.239 8.382,7.239 9.271,7.239
CLK: IC1.16 IC2.16 U9.13 | length 95
  Top Layer w0.254: IC2.16 6.096,53.975 6.604,53.467 6.604,36.321 7.525,35.4 21.877,35.4 v1(22.987,34.29) 22.987,32.784 U9.13@22.733,32.53 ; IC1.16 9.382,9.128 9.378,9.132 9.645,9.398 v1(11.176,9.398)
  Bottom Layer w0.254: v1(11.176,9.398) 11.286,9.398 11.875,8.809 11.875,3.95 13.689,2.136 21.762,2.136 25.546,5.92 25.546,33.763 25.019,34.29 v1(22.987,34.29)
DGND: C6.2 C7.2 C8.1 C9.2 IC2.10 J2.1 R15.2 R16.1 S1.2 S1.4 S2.2 S2.4 U9.1 U9.15 U9.38 U9.101 | length 42
  Top Layer w0.254: v1(0.925,61.575) 2.925,61.575 IC2.10 ; J2.1 3.011,23.659 S2.2 S2.4 8.578,23.659 ; U9.38 v1(7.747,52.705) ; C9.2@8.578,26.797 C9.2 8.578,23.659 ; C8.1 v1(11.372,29.395) ; S1.4 S1.2 8.578,23.659 ; U9.101 17.084,38.675 20.45,38.675 23.828,35.297 U9.15
  Top Layer w0.4: v1(5.588,31.242) 6.35,30.48 C6.2 ; C7.2@7.36,29.273 7.047,29.587 7.047,30.226 7.567,30.746 U9.1@7.567,32.521
  Top Layer w0.5: R16.1 v3(1.778,16.637) ; v3(25.56,51.435) R15.2
  other v2: 13.807,38.812 16.807,38.812 13.807,40.512 16.807,40.612 16.807,42.212 13.807,42.312
DNC1/INM_ECG: C5.2 R3.2 U1.A1 | length 8.8
  Top Layer w0.254: U1.A1 17.114,18.384 16.256,17.526 C5.2 R3.2
DNC3/INP_ECG: C3.2 R1.2 U1.B1 | length 4.1
  Top Layer w0.254: R1.2 C3.2 17.611,17.156 18.182,17.727 18.202,17.727 18.314,17.839 U1.B1
DNC7/RLD_OUT: J3.1 R8.1 U1.C2 | length 45.8
  Top Layer w0.254: v1(4.826,1.143) R8.1@4.826,2.159 ; U1.C2 19.514,17.443 20.193,16.764 20.193,15.621 20.955,14.859 26.543,14.859 27.178,14.224 27.178,4.699 J3.1 24.638,2.413 23.25,1.025 v1(22.6,1.025)
  Bottom Layer w0.254: v1(4.826,1.143) 4.945,1.024 22.599,1.024 v1(22.6,1.025)
"ECG LA": J3.2 R1.1 R10.1 | length 32.1
  Top Layer w0.254: R10.1 20.642,1.016 24.892,5.266 J3.2 24.815,11.89 20.622,11.89 20.066,12.446 20.066,14.612 19.386,15.292 R1.1
"ECG RA": J3.3 R3.1 R11.1 | length 11.3
  Top Layer w0.254: R11.1 16.704,3.625 J3.3 17.492,10.252 R3.1
ECGN: C20.1 C21.1 IC1.7 R11.2 | length 3.9
  Top Layer w0.254: IC1.7 9.882,3.326 10.229,2.979 C20.1 12.769,2.667 R11.2
ECGP: C19.2 C20.2 IC1.6 R10.2 | length 2.9
  Top Layer w0.254: R10.2 C19.2 C20.2 9.382,2.72 IC1.6
EN: C8.2 C9.1 R5.1 S2.1 S2.3 U9.3 | length 17
  Top Layer w0.254: S2.1 S2.3 7.644,26.763 8.186,27.305 11.684,27.305 12.065,27.686 12.065,29.591 11.361,30.295 C8.2 ; R5.1 C8.2 ; U9.3@10.107,32.521 U9.3@10.229,32.399 ; U9.3 10.414,32.385 C8.2
"FLASH CSN1": IC2.7 U9.27 | length 19.5
  Top Layer w0.254: IC2.7 13.462,61.595 15.65,59.407 15.65,52.175 16.35,51.475 21.175,51.475 21.717,50.933 U9.27
"FLASH CSN2": IC2.6 U9.28 | length 17.7
  Top Layer w0.254: IC2.6 14.175,60.325 15.25,59.25 15.25,51.975 16.125,51.1 20.175,51.1 20.447,50.828 U9.28
"FLASH MISO": IC1.18 IC2.8 U9.14 | length 101.7
  Top Layer w0.254: IC1.18 8.382,9.582 9.722,10.922 v1(11.176,10.922) ; IC2.8 9.144,62.865 6.985,60.706 6.985,36.515 7.7,35.8 22.493,35.8 24.257,34.036 U9.14 ; U9.14@24.139,32.394 24.257,32.276 v1(24.257,30.988)
  Bottom Layer w0.254: v1(11.176,10.922) 11.176,10.905 12.675,9.406 12.675,4.6 14.3,2.975 17.974,2.975 20.243,5.244 23.469,5.244 24.638,6.413 24.638,30.353 24.257,30.734 v1(24.257,30.988)
"FLASH MOSI": IC1.17 IC2.15 U9.16 | length 92.7
  Top Layer w0.254: IC2.15 2.953,55.253 v1(4.325,55.253) ; IC1.17 8.882,9.581 9.461,10.16 v1(11.176,10.16) ; v1(23.495,36.576) 23.504,36.567 U9.16 26.679,36.567 27.178,36.068 27.178,32.385 26.289,31.496 25.654,31.496 v1(25.019,30.861)
  Bottom Layer w0.254: v1(4.325,55.253) 12.438,55.253 22.606,45.085 22.606,37.465 v1(23.495,36.576) ; v1(11.176,10.16) 11.176,10.143 12.229,9.09 12.229,4.321 14.06,2.49 17.99,2.49 20.39,4.89 23.865,4.89 25.019,6.044 v1(25.019,30.861)
GATE: C4.1 pad.@13.675,11.05 R2.1 R21.1 S.2 | length 73.8
  Top Layer w0.5: v2(2.7,71.5) 3,71.8 R2.1
  Signal Layer 2 w0.5: v2(2.7,71.5) 2.7,69.3 9.175,62.825 9.175,15.55 pad.@13.675,11.05
  Bottom Layer w0.4: C4.1 14.375,8.4 S.2 16.625,5.475 R21.1
  Bottom Layer w0.5: pad.@13.675,11.05 13.675,9.6 C4.1
GND_BAT: C2.1 C4.2 pad.@1.4,71 pad.@22.15,8.45 Q1.2 R4.2 S.3 X1.3 | length 86.3
  Top Layer w0.5: pad.@1.5,71 1.4,71 R4.2 2.6,68.9 Q1.2 Q1.2@2.475,68.575
  Signal Layer 2 w0.5: pad.@1.4,71 1.4,69.751 8.575,62.576 8.575,14.8 13.494,9.881 18.044,9.881 19.475,8.45 pad.@22.15,8.45
  Bottom Layer w0.5: C4.2 15.481,8.9 16.031,8.35 16.569,8.35 17.069,8.85 S.3 18.35,8.075 C2.1 21.675,8.075 pad.@22.15,8.45
HSPICS0_MAX-CS: IC1.15 U9.23 | length 66.4
  Top Layer w0.254: IC1.15@9.906,8.636 v1(11.303,8.636) ; v1(23.495,45.402) 25.014,45.402 U9.23@25.077,45.466
  Bottom Layer w0.254: v1(11.303,8.636) 11.303,3.797 13.318,1.782 21.957,1.782 25.908,5.733 25.908,44.323 24.828,45.402 v1(23.495,45.402)
INM: J1.4 U1.A3 U3.1 | length 14.3
  Top Layer w0.254: J1.4@9.525,13.335 J1.4 9.525,15.494 9.806,15.775 11.323,15.775 11.804,16.256 13.462,16.256 13.989,16.783 13.989,20.301 v1(13.97,20.32) ; v1(13.989,22.752) 14.937,22.752 U1.A3
  Bottom Layer w0.254: v1(13.97,20.32) 13.989,20.339 v1(13.989,22.752)
INM2: J1.1 U1.B3 U5.1 | length 6.9
  Top Layer w0.254: J1.1 10.891,18.175 U5.1 11.938,20.066 13.335,21.463 14.848,21.463 U1.B3
INP: J1.2 U1.A2 U2.1 | length 10
  Top Layer w0.254: J1.2@10.953,14.021 J1.2 10.795,13.843 U2.1@12.604,13.843 ; U2.1@12.7,13.843 14.478,15.621 14.478,19.893 U1.A2
INP2: J1.8 U1.B2 U4.1 | length 12.7
  Top Layer w0.254: J1.8@6.827,14.021 J1.8 6.985,15.494 7.62,16.129 11.176,16.129 12.35,17.303 U4.1 13.239,17.303 13.462,17.526 v1(13.462,18.161) ; v1(15.24,18.161) 15.621,18.161 15.914,18.454 U1.B2
  Bottom Layer w0.254: v1(13.462,18.161) v1(15.24,18.161)
IO0: S1.1 S1.3 U9.25 | length 37.4
  Top Layer w0.254: S1.1 S1.3 v1(12.978,29.44) ; v1(12.978,45.061) 21.439,45.061 24.257,47.879 U9.25
  Bottom Layer w0.254: v1(12.978,29.44) v1(12.978,45.061)
"MAX INTB": IC1.21 U9.11 | length 65.6
  Top Layer w0.254: v1(6.858,9.525) 6.882,9.501 IC1.21 ; U9.11@20.267,32.521 20.447,32.341 20.447,30.734 20.847,30.334 26.016,30.334 v1(26.543,30.861)
  Bottom Layer w0.254: v1(6.858,9.525) 5,7.667 5,3.025 6.647,1.378 22.054,1.378 26.543,5.867 v1(26.543,30.861)
NetC11_2: C11.2 C12.2 IC1.22 R7.2 | length 3.6
  Top Layer w0.254: R7.2 C12.2 C11.2 4.538,7.723 IC1.22
NetC14_1: C14.1 IC1.10 | length 1.2
  Top Layer w0.254: IC1.10 C14.1@12.004,5.723
NetC14_2: C14.2 IC1.9 | length 1.6
  Top Layer w0.254: IC1.9 11.127,5.223 11.675,4.675 C14.2
NetC15_2: C15.2 IC1.25 R9.2 | length 3
  Top Layer w0.254: R9.2@4.006,4.953 4.006,5.719 C15.2 4.312,6.025 4.925,6.025 5.123,6.223 IC1.25
NetC16_2: C16.2 IC1.27 | length 2.9
  Top Layer w0.254: C16.2@4.006,3.9 4.408,3.9 4.953,4.445 4.953,5.08 5.096,5.223 IC1.27
NetC17_2: C17.2 IC1.23 | length 2
  Top Layer w0.254: C17.2 4.367,7.223 IC1.23
NetC18_2: C18.2 IC1.11 | length 1.5
  Top Layer w0.254: IC1.11 11.303,6.223 11.557,6.477 C18.2
NetC25_1: C25.1 U10.5 | length 1.4
  Top Layer w0.254: U10.5 21.337,55.179 C25.1
NetD1_1: D1.1 R6.2 | length 1.1
  Top Layer w0.254: D1.1 R6.2
NetD1_3: D1.3 R14.2 | length 1.5
  Top Layer w0.254: D1.3@1.55,27.559 R14.2 R14.2@2.955,27.583
NetL3_1: L3.1 U10.9
NetQ1_1: Q1.1 R2.2 R4.1 | length 2.1
  Top Layer w0.5: R2.2@3.925,70.632 3.925,69.775 4,69.7 4,68.95 Q1.1
NetR6_1: R6.1 U9.12 | length 25
  Top Layer w0.254: R6.1 4.762,28.2 v1(7.8,28.2) ; v1(15.775,34.275) 21.325,34.275 21.717,33.883 U9.12
  Bottom Layer w0.254: v1(7.8,28.2) 8.475,28.2 9.077,28.802 13.689,28.802 14.097,29.21 14.097,33.847 14.475,34.225 15.725,34.225 v1(15.775,34.275)
NetR8_2: R8.2 R9.1 | length 6.2
  Top Layer w0.254: R9.1@3.106,4.953 2.903,4.75 1.829,4.75 1.575,4.496 1.575,2.616 2.032,2.159 R8.2
NetR12_2: R12.2 U10.7 | length 2.7
  Top Layer w0.254: U10.7 19.677,60.444 19.812,60.579 R12.2
NetR13_2: R13.2 U11.4 | length 1.2
  Top Layer w0.254: U11.4 7.533,69.962 R13.2
NetR14_1: R14.1 U9.8 | length 16.7
  Top Layer w0.254: R14.1@3.879,27.686 3.892,27.673 11.123,27.673 v1(11.425,27.975) ; v1(15.24,30.861) 16.336,30.861 16.637,31.162 U9.8
  Bottom Layer w0.254: v1(11.425,27.975) 14.386,27.975 15.24,28.829 v1(15.24,30.861)
NetR18_1: R18.1 R20.2 U10.2 | length 3.1
  Top Layer w0.254: R20.2 R20.2@18.677,52.9 ; U10.2 R20.2@18.677,52.9 ; R18.1 R20.2@18.677,52.9
NetR19_1: R19.1 U9.26 U10.3 | length 8.5
  Top Layer w0.254: U10.3 19.177,54.223 19.55,53.85 R19.1 21.725,52.4 22.987,51.138 U9.26
NetX1_1: X1.1 X1.2 | length 10.9
  Bottom Layer w0.8: X1.2@6.314,13.335 X1.1@17.224,13.335
PGND: C22.2 C23.2 C24.1 C25.2 C26.1 C27.1 pad.@9.625,70.025 pad.@9.625,71.275 pad.@25.56,57.023 Q1.3 R15.1 R20.1 U10.8 U11.3 U11.7 | length 6.6
  Top Layer w0.254: U11.3 7.508,65.622 C27.1 ; v1(16.475,53.8) 16.475,53.3 16.875,52.9 R20.1 ; C25.2 v1(22.925,56.275)
  Top Layer w0.5: R15.1 pad.@25.56,57.023
RXD: J2.4 U9.34 | length 44.9
  Top Layer w0.254: v1(10.16,51.689) 10.179,51.708 12.173,51.708 12.647,51.234 U9.34@12.647,49.521
  Bottom Layer w0.254: J2.4 3.185,19.675 6.5,19.675 6.866,20.041 6.866,50.935 7.62,51.689 v1(10.16,51.689)
SDOUT: U1.E2 U9.31 | length 30.9
  Top Layer w0.254: v1(16.637,47.625) U9.31 ; v1(22.987,22.746) 23.241,22.746 23.258,22.729 U1.E2
  Bottom Layer w0.254: v1(16.637,47.625) 19.431,44.831 19.431,25.654 22.339,22.746 v1(22.987,22.746)
SEN: U1.E3 U9.29 | length 28.7
  Top Layer w0.254: v1(19.177,46.482) U9.29 ; v1(22.987,23.946) 23.004,23.929 U1.E3
  Bottom Layer w0.254: v1(19.177,46.482) 20.066,46.482 21.844,44.704 21.844,25.089 v1(22.987,23.946)
TX1: J1.6 U1.D4 U8.1 | length 33.6
  Top Layer w0.254: J1.6@8.255,13.462 J1.6 8.224,14.148 U8.1 13.589,12.192 13.97,12.573 v1(13.97,14.351) ; v1(16.51,26.416) 19.812,26.416 20.214,26.818 U1.D4
  Bottom Layer w0.254: v1(13.97,14.351) 11.665,16.656 11.665,25.762 12.319,26.416 v1(16.51,26.416)
TX2: J1.7 U1.E5 U7.1 | length 22.2
  Top Layer w0.254: J1.7@6.985,18.923 J1.7 7.081,18.175 U7.1 7.081,20.924 v1(7.747,21.59) ; v1(16.51,27.305) 18.669,27.305 19.014,27.65 U1.E5
  Bottom Layer w0.254: v1(7.747,21.59) 7.747,26.289 8.763,27.305 v1(16.51,27.305)
TX3: J1.5 U1.E4 U6.1 | length 23.9
  Top Layer w0.254: J1.5@8.255,18.923 J1.5 8.159,18.175 U6.1 8.159,20.986 8.636,21.463 v1(12.192,21.463) ; v1(16.51,25.527) 20.955,25.527 21.414,25.986 U1.E4
  Bottom Layer w0.254: v1(12.192,21.463) 12.192,25.019 12.7,25.527 v1(16.51,25.527)
"TX SUP": C1.2 C6.1 C7.1 C13.1 C23.1 C24.2 C26.2 D1.2 IC1.19 IC2.2 J1.10 J2.3 pad.@12.4,70.225 pad.@13.925,70.225 pad.@23.375,59.025 R5.2 R13.1 R19.2 U1.C1 U1.C4 U1.F5 U9.2 U10.1 U10.4 U10.6 U10.10 U11.6 | length 112.7
  Top Layer w0.254: D1.2 5.017,30.583 6.85,28.75 7.864,28.75 C7.1 ; v1(4.65,72.325) 5.775,72.325 6.171,71.928 R13.1 R13.1 6.238,69.937 U11.6 ; J1.10@5.509,13.973 J1.10 ; IC1.19 C13.1@7.882,10.668 ; C13.1 8.763,10.668 9.525,11.43 v1(9.525,11.5) ; U9.2@8.837,32.521 U9.2@9.017,32.341 ; IC2.2 12.34,55.2 v1(14.2,55.2) ; U10.1 18.177,55.927 18.527,56.277 19.573,56.277 ; U10.4 19.677,56.173 19.573,56.277 ; U1.F5@22.352,28.392 U1.F5 ; pad.@23.375,59.025 20.177,59.05 20.177,56.852 19.602,56.277 19.573,56.277
  Top Layer w0.4: J1.10@5.509,13.973 C1.2 3.937,20.437 5.725,22.225 v1(12.827,22.225) ; U9.2@9.017,32.341 9.017,30.919 8.451,30.353 C7.1 9.467,29.337 R5.2 9.525,28.85 v1(10.1,28.275) ; v1(16.002,29.845) 16.002,29.266 U1.C4 ; v1(16.51,24.638) 21.844,24.638 22.352,25.146 U1.F5@22.352,28.392 ; v1(20.714,17.92) U1.C1 ; U1.F5 23.297,29.337 v1(23.876,29.337)
  Top Layer w0.5: J2.3 2.921,22.479 3.775,21.625 v3(4.225,21.625) ; R19.2 23.4,53.85 24.05,54.5 24.05,58.35 pad.@23.375,59.025
  Bottom Layer w0.4: v1(12.827,22.225) 12.827,24.13 13.335,24.638 v1(16.51,24.638)
  Bottom Layer w0.5: pad.@12.4,70.225 12.4,71.55 13.1,72.25 25.475,72.25 26.85,70.875 26.85,59.825 26.075,59.05 pad.@23.375,59.025
TXD: J2.5 U9.35 | length 43
  Top Layer w0.254: U9.35@11.377,49.521 v1(11.377,51.181)
  Bottom Layer w0.254: J2.5 2.315,19.275 6.725,19.275 7.22,19.77 7.22,50.654 7.747,51.181 9.923,51.181 9.942,51.162 11.358,51.162 v1(11.377,51.181)
VCC: C2.2 C22.1 L3.2 pad.@22.225,6.694 pad.@25.625,68.75 pad.@25.625,70.35 R12.1 R18.2 R21.2 S.1 X1.4 | length 93
  Top Layer w0.4: v1(20.325,52.125) R18.2
  Signal Layer 2 w0.5: pad.@22.225,6.694 24.144,6.694 25.7,8.25 25.7,50.1 26.85,51.25 26.85,67.525 pad.@25.625,68.75
  Bottom Layer w0.4: R21.2 18.525,5.475 18.584,6.145 S.1@18.59,6.215 ; v1(20.325,52.125) 20.325,61.675 21.375,62.725 24.875,62.725 25.625,63.475 pad.@25.625,68.75
  Bottom Layer w0.5: S.1 18.59,6.215 19.55,7.175 C2.2 21.744,7.175 pad.@22.225,6.694
"VCC 1.8V": C10.2 C27.2 IC1.13 pad.@1.905,65.532 R7.1 U11.1 | length 11.6
  Top Layer w0.254: v1(1.778,9.906) R7.1@3.36,9.906 ; pad.@1.905,65.532 C27.2@6.173,65.532 ; C27.2 6.238,65.622 U11.1 ; IC1.13 11.98,7.223 C10.2 12.123,7.805 12.418,8.1 13.619,8.1 14.244,7.475 v1(14.2,7.475)
pads on no net: IC1.20 IC2.1 IC2.3 IC2.4 IC2.5 IC2.9 IC2.11 IC2.12 IC2.13 IC2.14 J1.9 J2.2 J2.6 J3.None U1.A5 U1.B5 U1.C5 U1.D2 U9.4 U9.5 U9.6 U9.7 U9.17 U9.18 U9.19 U9.20 U9.21 U9.22 U9.32 U11.2 U11.5 X1.0

## Polygon pours and split planes (outlines as drawn)
"TX SUP" on Top Layer "TX_SUP_L01_P006" (solid, remove dead copper, pour order 6): 18.288,58.928 18.288,61.214 17.399,62.103 16.95,62.552 16.95,69.001 16.129,70.025 15.387,70.95 11.008,70.95 11.008,70.675 11.008,70.305 14.224,65.97 14.224,63.119 14.224,62.865 16.129,60.96 17.78,60.96 17.78,58.928
PGND on Top Layer "PGND_L01_P004" (solid, remove dead copper, pour order 4): 19.304,58.039 19.304,58.547 19.304,60.325 19.177,60.325 19.05,60.325 19.05,58.547 17.526,58.547 17.399,58.547 17.272,58.674 17.272,60.325 16.891,60.706 16.002,60.706 13.97,62.738 13.97,65.303 11.5,68.775 10.575,70.075 10.575,72.2 9.044,72.2 0.5,72.2 0.5,64.643 10.882,64.643 17.486,58.039
NetL3_1 on Top Layer "NETL3_1_L01_P008" (solid, remove dead copper, pour order 8): 18.525,58.95 18.525,61.375 18.525,61.4 17.4,62.525 17.4,67.725 21,67.725 21,67.65 21,61.4 19.275,61.4 18.85,60.975 18.85,58.95 18.525,58.95 18.5,58.925
PGND on Top Layer "PGND_L01_P010" (solid, remove dead copper, pour order 10): 17.4,68.1 21,68.1 21,72.2 9,72.2 9,71.35 15.863,71.35 17.4,69.45
VCC on Top Layer "VCC_L01_P014" (solid, remove dead copper, pour order 14): 22.25,60.075 22.25,61.4 22.225,61.425 21.525,61.425 21.525,72.15 21.5,72.175 21.575,72.25 27,72.25 27,60.025 26.975,60 26.95,59.975 22.275,59.975
GND_BAT on Bottom Layer "GND_BAT_L04_P012" (solid, remove dead copper, pour order 12): 8.825,64.625 0.4,64.625 0.4,72.475 8.825,72.475 8.825,64.675
VCC on Bottom Layer "VCC_L04_P016" (solid, remove dead copper, pour order 16): 14.65,71.65 14.65,65.225 14.675,65.2 14.775,65.2 25.1,65.2 25.1,68.325 26.45,68.325 26.45,70.75 25.55,71.65
PGND on Signal Layer 1 "NONET_L04_P-001" (solid, remove dead copper, pour order 24): 0,63.627 -0.003,63.63 -0.003,72.075 -0.003,72.547 0.225,72.775 0.475,73.025 1,73.025 27.323,73.025 27.65,73.025 27.875,72.8 28.043,72.632 28.043,72.247 28.043,53.002 28,52.959 16.256,52.959 15.075,54.14 15.075,61.252 12.7,63.627 0,63.627
DGND on Signal Layer 1 "NONET_L04_P-001" (solid, remove dead copper, pour order 22): 0,14.224 2.54,14.224 4.55,16.234 4.55,20.75 7.549,23.749 19.558,23.749 20.955,25.146 20.955,29.083 22.097,30.225 28,30.225 28,52.725 16.125,52.725 14.75,54.1 14.75,61.325 12.675,63.4 0,63.4 0,54.45 6.425,54.45 6.425,31.885 0.025,31.885 0.025,14.249
AGND on Signal Layer 1 "NONET_L04_P-001" (solid, remove dead copper, pour order 20): 0,14.025 0,0.998 0,0.5 0.275,0.225 0.5,0 0.925,0 27.069,0 27.55,0 27.85,0.3 28.042,0.492 28.042,0.921 28.042,29.975 28,29.975 27.858,29.975 22.15,29.975 21.125,28.95 21.125,24.975 19.6,23.45 7.6,23.45 4.75,20.6 4.75,16.05 2.725,14.025
"TX SUP" on Signal Layer 2 "VCC 3.3V" (solid, remove dead copper, pour order 34): 15.775,0.018 15.775,8.343 5.25,8.343 5.25,20.525 4.725,21.05 3.7,21.05 3.475,21.275 3.475,22.3 3.925,22.75 9.275,22.75 9.275,63.131 5.588,66.818 0.018,66.818 0.015,72.093 0.015,72.39 0.015,72.525 0.05,72.625 0.225,72.8 0.437,73.012 0.575,73.043 0.668,73.043 1.045,73.043 27.341,73.043 27.618,73.043 28.018,72.643 28.06,72.601 28.06,0.535 27.743,0.218 27.543,0.018 27.087,0.018
"VCC 1.8V" on Signal Layer 2 "VCC 1.8V" (solid, remove dead copper, pour order 32): 15.325,0 15.325,8.025 4.775,8.025 4.775,20.55 4.525,20.8 3.375,20.8 3.125,21.05 3.125,22.55 3.625,23.05 8.475,23.05 8.475,64.125 6.15,66.45 0.025,66.45 0,66.475 0,54.45 6.425,54.45 6.425,31.875 0.025,31.875 0,31.85 0,0.998 0,0.525 0.4,0.125 0.525,0 0.925,0

## Keep-outs
Keep-Out Layer:
  region: -0.125,50.05 6.275,50.05 6.275,31.975 -0.125,31.975

## Silkscreen, mask and mechanical layers (free items; w line width, h text height)
Top Overlay:
  text "3.3V" at 11.4,71.175 h1
  text "1.8V" at 0.925,64 h1
  text "VBAT" at 26.55,63.75 h1 r90
  text "+" at 27.35,57.85 h1 r90
  text "SPECTRE 3.0" at 26.946,18.602 h1 r90
  text "+" at 15.675,1.525 h1 r90
Mechanical 1:
  lines w0.254: -0.003,72.075 cw(c0.925,72.1) 1,73.025 ; 0,0.998 ccw(c0.925,0.923) 0.925,-0.005 ; 0,1.025 0,72.1 ; 0.925,0 27.069,0 ccw(c27.142,0.897) 28.042,0.921 ; 1.027,73.025 27.323,73.025 ; 27.304,73.027 cw(c27.323,72.305) 28.043,72.247 ; 28.042,0.897 28.043,72.246 ; 28.043,72.246 28.043,72.246

## Text inside footprints (layer, text, board x,y; h text height)
J1: Top Overlay "1" at 12.275,19.8 h1 r180; Top Overlay "2" at 12.9,13.2 h1 r180; Top Overlay "9" at 4.55,19.229 h1 r180; Top Overlay "10" at 4.445,15.875 h1 r180
J2: Top Overlay "1" at 1.118,26.594 h1 r270